# Altium PCB Secondary Display.PcbDoc
Units mm, origin at the board's own origin, x right, y up, seen from the top; angles counter-clockwise.
Board outline 43 x 41.4 mm, 2 copper layers (Top Layer, Bottom Layer); 3 components, 24 nets, 42 pads, 16 vias.
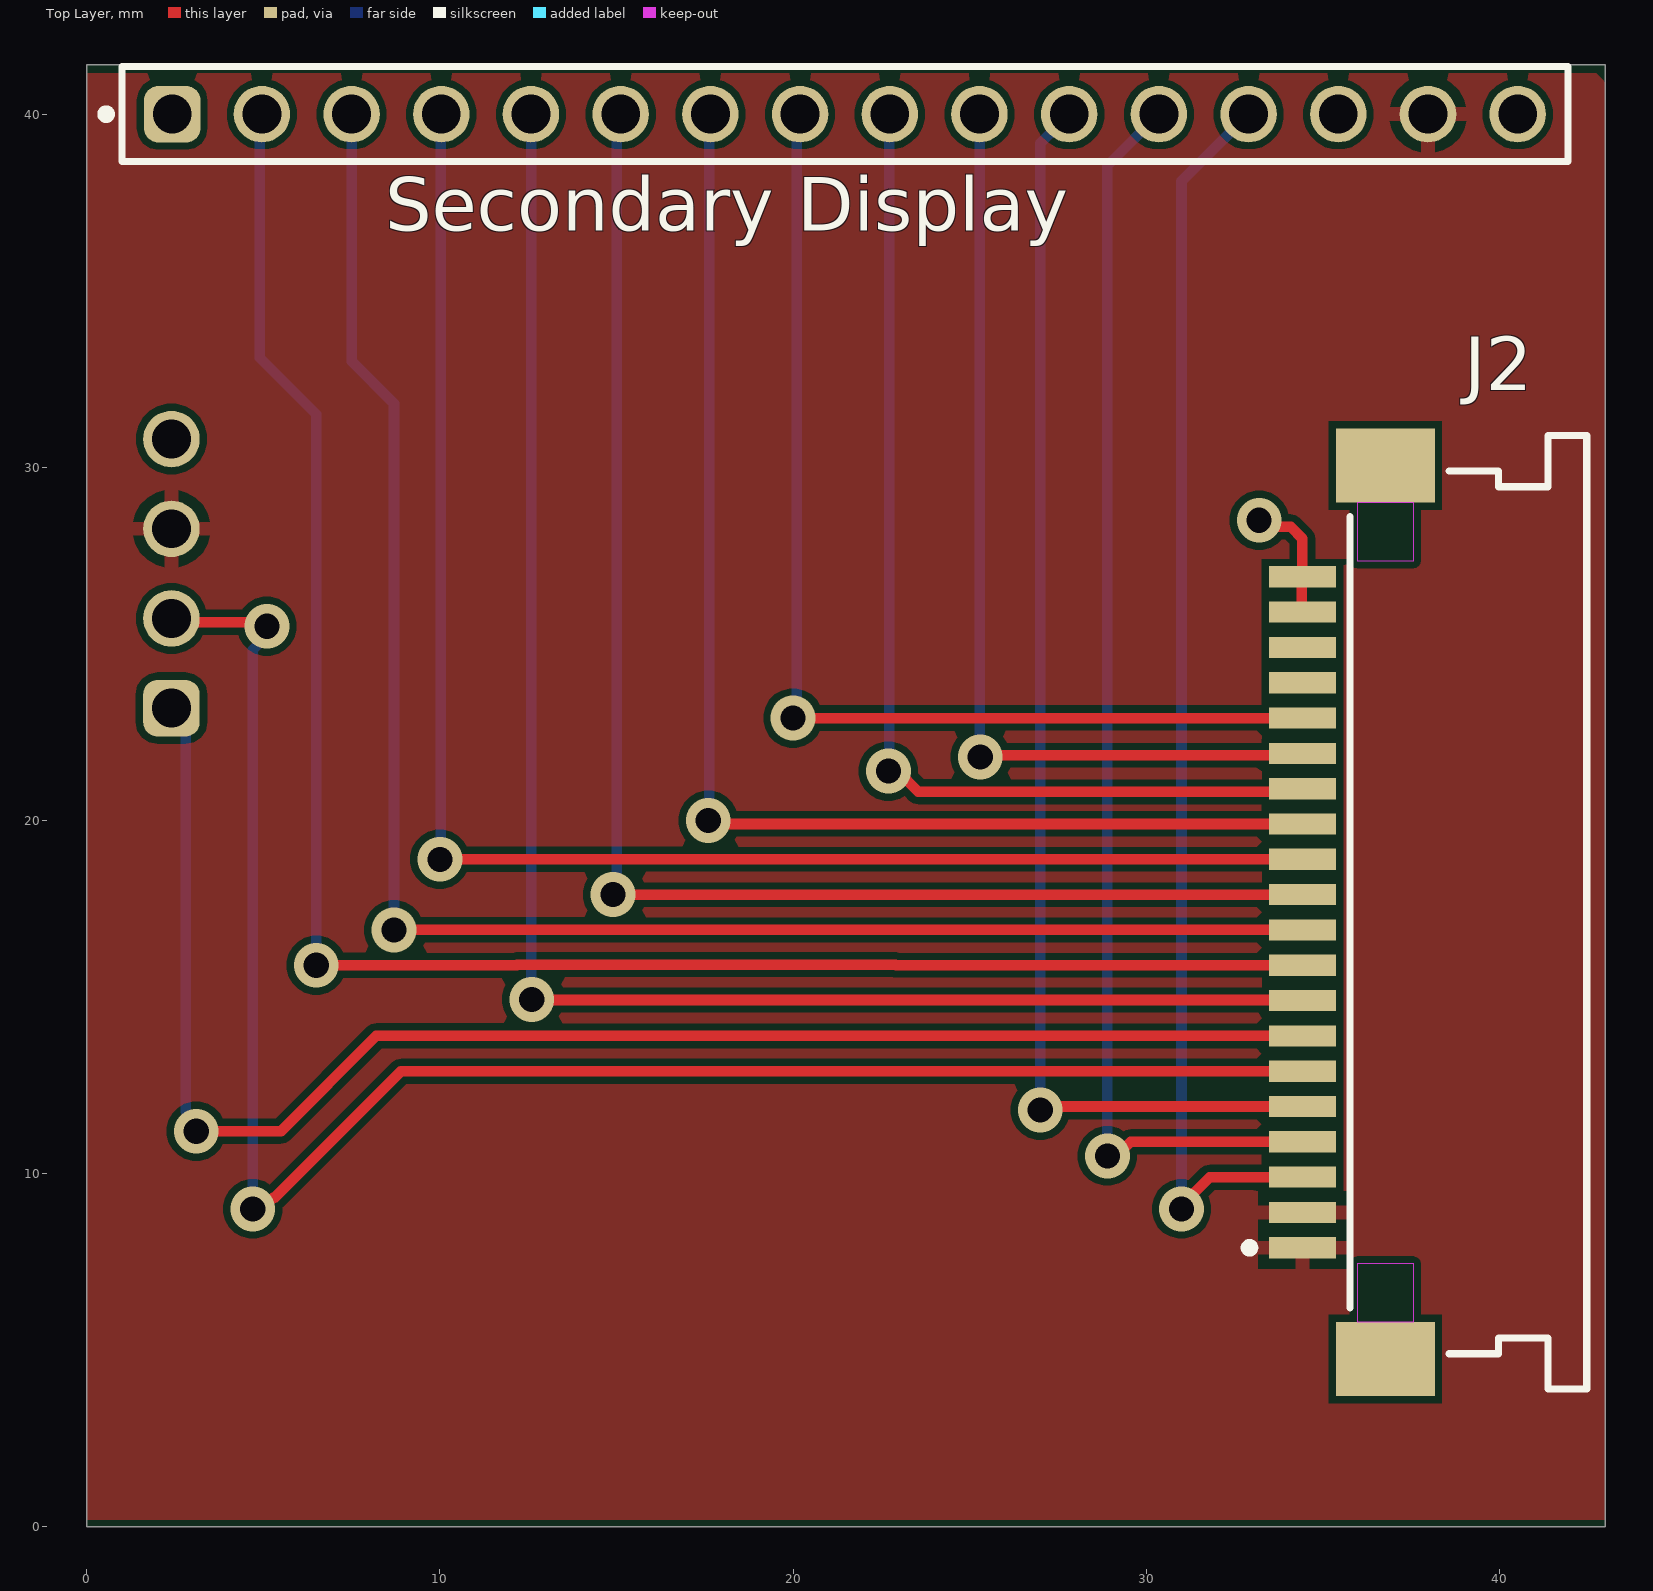
[diagram p0: Top Layer view]
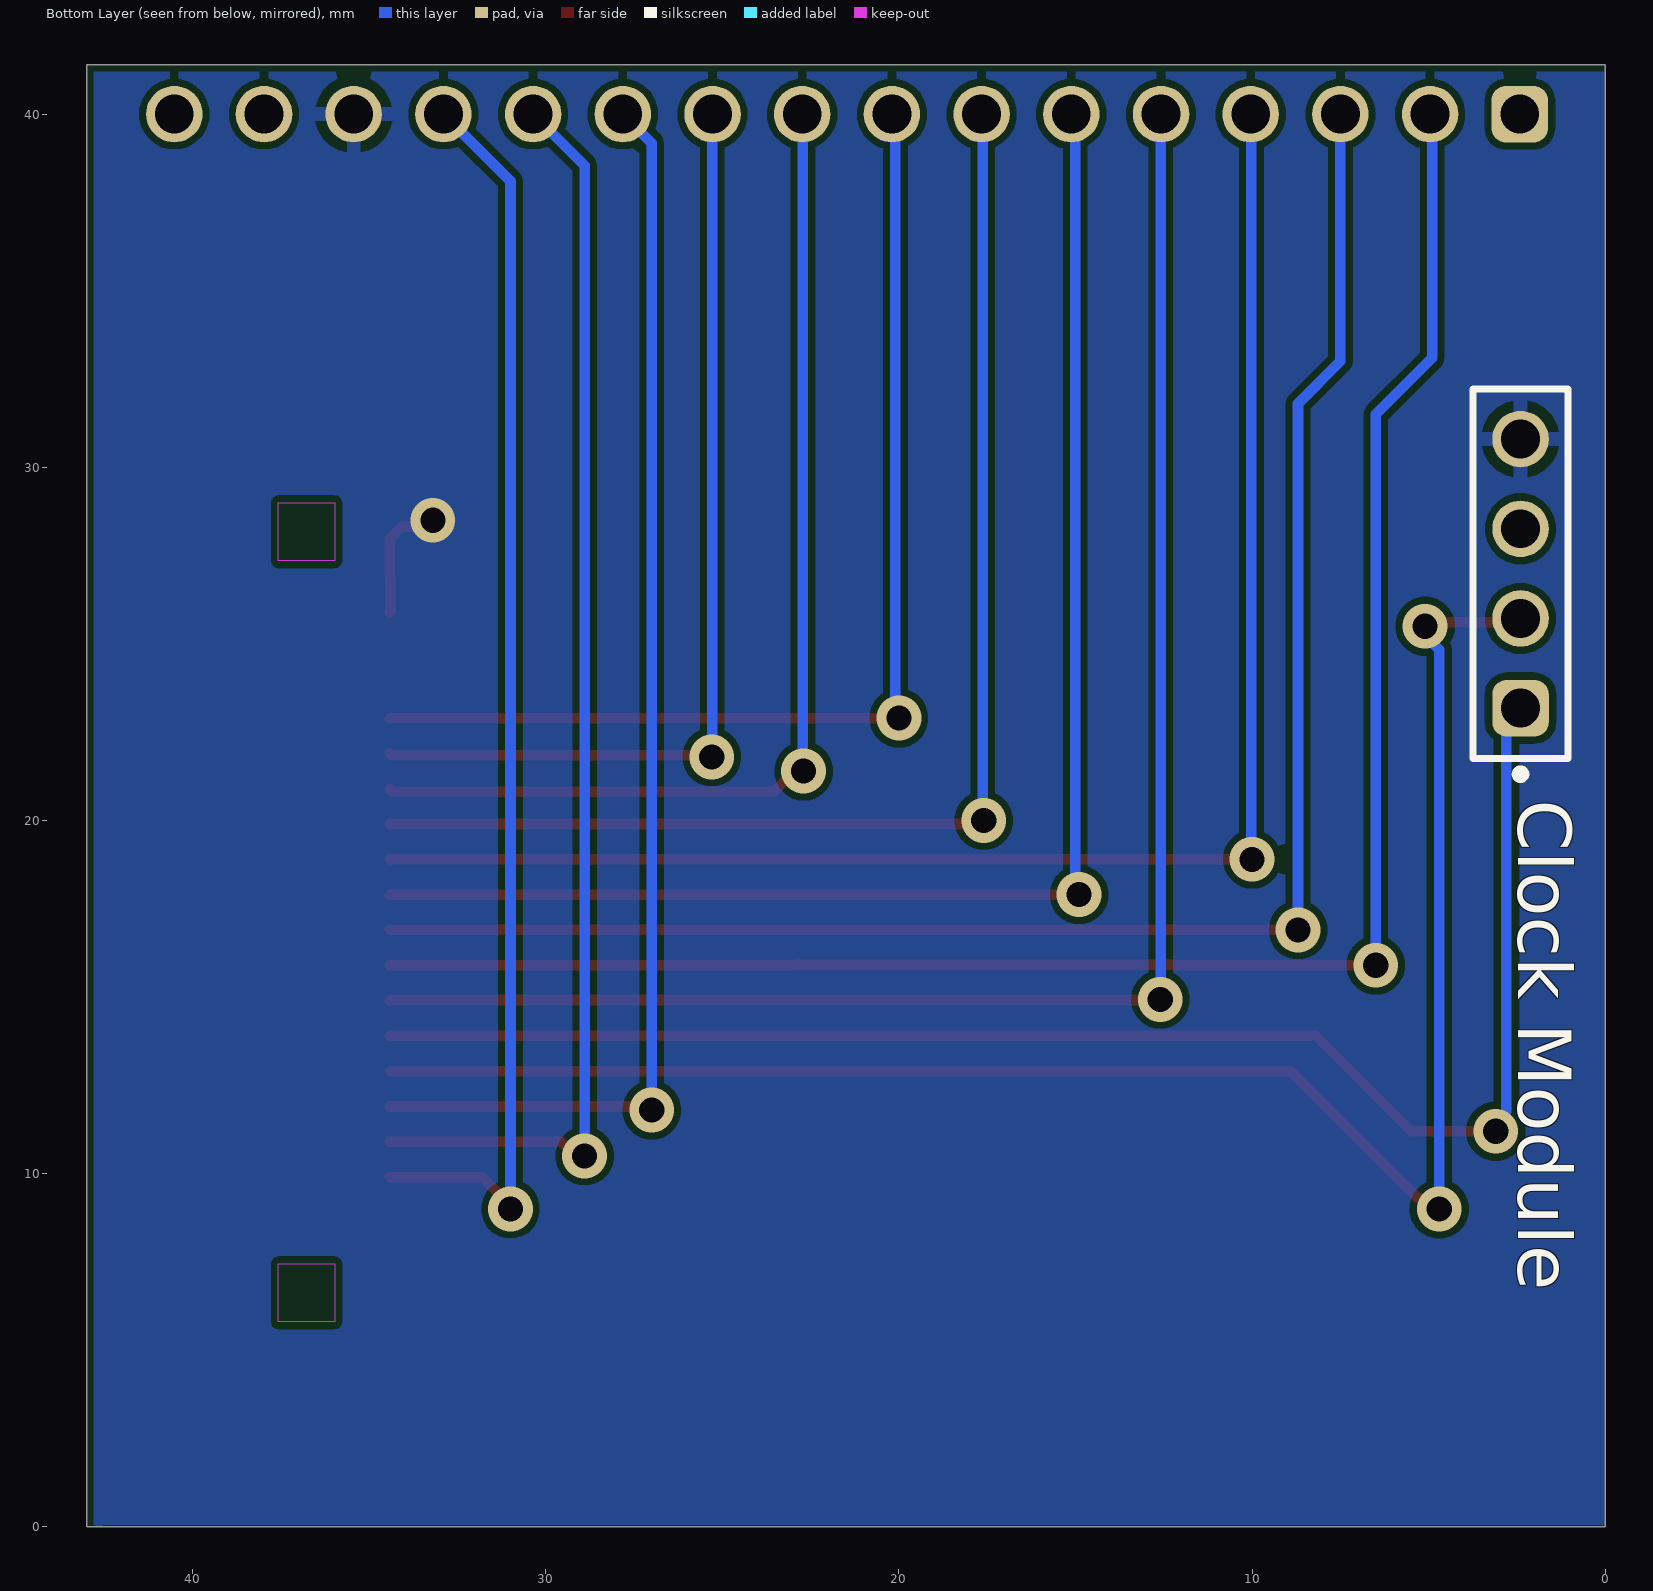
[diagram p1: Bottom Layer view, seen from below]

## Layer stack, top to bottom
Top Solder: solder mask 0.0102, Solder Resist, Dk 3.5
Top Layer: signal copper 0.0356
Dielectric1: dielectric 0.32, FR-4, Dk 4.8
Bottom Layer: signal copper 0.0356
Bottom Solder: solder mask 0.0102, Solder Resist, Dk 3.5

## Board outline
0,0 43,0 43,41.4 0,41.4

## Design rules (kind name [scope] priority, off if disabled: settings)
Clearance Polygon_Clearance [All vs InPolygon] p1: gap=0.2 ignorepadtopadclearanceinfootprint=FALSE
Clearance [All] p2: gap=0.2 ignorepadtopadclearanceinfootprint=TRUE
ComponentClearance [InComponent('U3')] p1: gap=0 collisioncheckmode=3 verticalgap=0.254 showdistances=FALSE
Height [All] p1: minheight=0 maxheight=75 prefheight=12.7
HoleSize [All] p1: absolutevalues=TRUE maxlimit=6.35 minlimit=0.3 maxpercent=80.000 minpercent=20.000
MinimumAnnularRing [All] p1: minimumring=0.15
MinimumSolderMaskSliver [All] p1: minsoldermaskwidth=0.2
NetAntennae NetAntennae_5.0V [InNet('5.0V')] p1: netantennaetolerance=0
NetAntennae NetAntennae_3.3V [InNet('3.3V')] p2: netantennaetolerance=0
PlaneClearance [All] p1: clearance=0.3
PlaneConnect [All] p1: planeconnectstyle=Relief reliefexpansion=0.3 reliefentries=4 reliefconductorwidth=0.3 reliefairgap=0.3
PolygonConnect ViaConnect [All vs IsVia] p1: connectstyle=Direct reliefconductorwidth=0.381 reliefentries=4 polygonreliefangle="90 Angle" airgapwidth=0.254
PolygonConnect [All] p2: connectstyle=Relief reliefconductorwidth=0.4 reliefentries=4 polygonreliefangle="90 Angle" airgapwidth=0.3
RoutingVias [All] p1: holewidth=0.3 width=0.6 viastyle="Through Hole" minholewidth=0.3 minwidth=0.6 maxholewidth=5 maxwidth=10
SilkToSilkClearance [All] p1: silktosilkclearance=0
SilkToSolderMaskClearance [IsPad] p1: minsilkscreentomaskgap=0 clearancetoexposedcopper=TRUE
SolderMaskExpansion [All] p1: expansion=0.102 istentingtop=FALSE
SupplyNets "Schematic Supply Nets" [InNet('GND')] p1: voltage=0.000
UnConnectedPin [All] p1 off:
Width [All] p1: maxlimit=10 minlimit=0.2 preferedwidth=0.3 minimp=50.000000 maximp=50.000000 favimp=50.000000
21 further rules are at their usual default settings.

## Components (designator, comment, footprint, x,y, rotation, side; value= is the part's Value field where it differs from the comment)
"Clock Module" "61300411121" 61300411121 2.4,26.99 r90 bottom
J2 "52271-2079" MOLX-52271-2079 35.6,17.4 r90 top
"Secondary Display" "61301611121" 61301611121 21.47,40 r0 top

## Footprints (in the part's own frame and the unit in brackets; to place one, negate y for a bottom-side part, rotate by r counter-clockwise, add the part's x,y. Pads: shape width x height; smd on the part's side, far side on the other; paste and mask are expansions set on the pad)
61300411121 [mm] "Pin Header, pitch 2.54 mm, THT, Vertical, single row, 4p"
  rrect50% 1.6x1.6 hole 1.1: 1(-3.81,0)
  round 1.6 hole 1.1: 2(-1.27,0) 3(1.27,0) 4(3.81,0)
  silkscreen extent -5.8,-1.35 5.23,1.35, body extent -5.08,-1.27 5.08,1.27, height 8.57
61301611121 [mm] "Pin Header, pitch 2.54 mm, THT, Vertical, single row, 16p"
  rrect50% 1.6x1.6 hole 1.1: 1(-19.05,0)
  round 1.6 hole 1.1: 2(-16.51,0) 3(-13.97,0) 4(-11.43,0) 5(-8.89,0) 6(-6.35,0) 7(-3.81,0) 8(-1.27,0) 9(1.27,0) 10(3.81,0) 11(6.35,0) 12(8.89,0) 13(11.43,0) 14(13.97,0) 15(16.51,0) 16(19.05,0)
  silkscreen extent -21.04,-1.35 20.47,1.35, body extent -20.32,-1.27 20.32,1.27, height 8.57
MOLX-52271-2079 [mm] "FPC Connector, 20-Leads, Right Angle, Pitch 1.0 mm, Mated Height 3.0 mm, SMT"
  rect 0.6x1.9 smd: 1(-9.5,1.175) 2(-8.5,1.175) 3(-7.5,1.175) 4(-6.5,1.175) 5(-5.5,1.175) 6(-4.5,1.175) 7(-3.5,1.175) 8(-2.5,1.175) 9(-1.5,1.175) 10(-0.5,1.175) 11(0.5,1.175) 12(1.5,1.175) 13(2.5,1.175) 14(3.5,1.175) 15(4.5,1.175) 16(5.5,1.175) 17(6.5,1.175) 18(7.5,1.175) 19(8.5,1.175) 20(9.5,1.175)
  rect 2.1x2.8 smd: MP1(-12.65,-1.175) MP2(12.65,-1.175)
  Keep-Out Layer region: -9.95,-0.375 -11.6,-0.375 -11.6,-1.975 -9.95,-1.975
  Keep-Out Layer region: 9.95,-1.975 11.6,-1.975 11.6,-0.375 9.95,-0.375
  silkscreen extent -13.5,-6.87 13.5,2.8, body extent -13.5,-6.87 13.5,1.82, height 3.01

## Part data
"Clock Module": library part CMP-1502-01064-3, Color=Black, Contact Resistance=20mΩ, Current Rating=3A, Max Operating Temperature=105°C, Min Operating Temperature=-40°C, Operating Supply Voltage=250V, Connector Type="Male Pin", Contact Material=Copper, Contact Mating Length=5.9944mm, Contact Plating=Gold, Gender=Male, Height=8.89mm, Lead Free="Lead Free", Lead Pitch=2.54mm, Mount="Through Hole", NexarPartId=32855522, Number of Contacts=4, Number of Pins=4, Number of Positions=4, Number of Rows=1, Orientation=Vertical, Packaging=Bulk, Pitch=2.54mm, REACH SVHC=Unknown, RoHS=Compliant, Termination=Solder, Voltage Rating=250V
J2: library part CMP-1241-00254-1, "1.0 mm Pitch Easy-On(TM) Type FPC Connector, 3.0 mm Mated Height, Right Angle, ZIF, SMT, Bottom Contact, 20 Circuits, -40 to 85 degC, ELV and RoHS Compliant, Tape and Reel", Current (Max per Contact)=0.5A, Manufacturer=Molex, Voltage (Max)="50V AC (RMS)/DC", Circuits (Loaded)=20, ComponentLink1Description="Manufacturer URL", ComponentLink1URL=http://www.molex.com/molex/index.jsp, ComponentLink2Description=Datasheet, ComponentLink2URL=http://www.molex.com/webdocs/datasheets/pdf/en-us/0522712079_FFC_FPC_CONNECTORS.pdf, ComponentLink3Description="Package Specification", ComponentLink3URL=http://www.molex.com/pdm_docs/sd/522712079_sd.pdf, Contact Position=Bottom, Durability (mating cycles max)=30, Entry Angle="90degrees Angle", Mated Height=3.00mm, Material - Metal="Phosphor Bronze", Material - Plating Mating=Tin-Bismuth, Material - Plating Termination=Tin-Bismuth, Mounting Technology="Surface Mount", Number of Rows=1, Orientation="Right Angle", PackageDescription="20-Lead FPC Connector, Pitch 1.0 mm", PackageReference=52271-2079, PackageVersion="Rev. B, 04/2004", Packing="Tape and Reel", PartNumber=52271-2079, PCB Locator=No, PCB Retention=Yes, Pitch - Mating Interface=1.00mm, Pitch - Termination Interface=1.00mm, Polarized to PCB=Yes, RoHS=TRUE, Stackable=No
"Secondary Display": library part CMP-1502-01095-4, Color=Black, Contact Resistance=20mΩ, Current Rating=3A, Max Operating Temperature=105°C, Min Operating Temperature=-40°C, Operating Supply Voltage=250V, Connector Type="Male Pin", Contact Material=Copper, Contact Mating Length=5.9944mm, Contact Plating=Gold, Gender=Male, Height=8.89mm, Lead Pitch=2.54mm, Mount="Through Hole", NexarPartId=32855548, Number of Contacts=16, Number of Pins=16, Number of Positions=16, Number of Rows=1, Orientation=Vertical, Packaging=Bulk, Pitch=2.54mm, REACH SVHC=Unknown, RoHS=Compliant, Termination=Solder, Voltage Rating=250V

## Via types
v1: diameter 1.27, hole 0.711, Top Layer to Bottom Layer, 16 vias

## Nets (pads, with @x,y where several pads share a name; then routed paths per layer and width w, separated by ;. In a path a pad name is that pad's centre, name@x,y a point inside that pad or via, vN(x,y) a via of type N, cw(c..) or ccw(c..) an arc to the next point about the centre after c; other vN are vias at no path point)
3.7V_IN: 
3_3V: "Clock Module.3" "Secondary Display.15" J2.1 J2.2
GND: "Clock Module.4" "Secondary Display.14" J2.19 J2.20 | length 3.5
  Top Layer w0.3: v1(33.2,28.5) 33.386,28.314 34.089,28.314 34.425,27.978 J2.20 ; J2.20@34.4,26.9 34.4,25.925 J2.19
I2C_SCL: "Clock Module.1" J2.7 | length 44.8
  Top Layer w0.3: 2.4,23.18 2.44,23.14 ; v1(3.1,11.2) 5.5,11.2 8.2,13.9 J2.7
  Bottom Layer w0.3: 2.4,23.18 2.8,22.78 2.8,11.762 3.1,11.462 v1(3.1,11.2)
I2C_SDA: "Clock Module.2" J2.6 | length 50.8
  Top Layer w0.3: 2.4,25.72 2.51,25.61 4.99,25.61 v1(5.1,25.5) ; v1(4.7,9) 4.962,9 5.28,9.317 5.317,9.317 8.9,12.9 J2.6@34.4,12.9
  Bottom Layer w0.3: v1(4.7,9) 4.7,24.838 5.1,25.238 v1(5.1,25.5)
SEC_SCREEN_BACKLIGHT: "Secondary Display.8" J2.16 | length 31.4
  Top Layer w0.3: v1(20,22.9) J2.16
  Bottom Layer w0.3: v1(20,22.9) 20.1,23 20.1,39.6 20.3,39.8
SEC_SCREEN_TOGGLE: 
SPI0_CSn_LEFT: "Secondary Display.13" J2.3 | length 35.6
  Top Layer w0.3: v1@31,9.1 31.8,9.9 J2.3
  Bottom Layer w0.3: v1(31,9) 31,38.1 32.8,39.9 33,39.9
SPI0_CSn_RIGHT: 
SPI0_DC_LEFT: "Secondary Display.11" J2.5 | length 36
  Top Layer w0.3: v1(27,11.8) 27.1,11.9 J2.5
  Bottom Layer w0.3: v1(27,11.8) 27,39.18 27.82,40
SPI0_DC_RIGHT: 
SPI0_RESET_LEFT: "Secondary Display.12" J2.4 | length 35.6
  Top Layer w0.3: v1(28.9,10.5) 29.162,10.5 29.563,10.9 J2.4
  Bottom Layer w0.3: v1(28.9,10.5) 28.9,38.54 30.2,39.84 30.2,39.9
SPI0_RESET_RIGHT: 
SPI0_RX: "Secondary Display.7" J2.13 | length 36.8
  Top Layer w0.3: v1(17.6,20) 17.7,19.9 J2.13
  Bottom Layer w0.3: v1(17.6,20) 17.63,20.03 17.63,39.83 17.7,39.9
SPI0_SCK: "Secondary Display.9" J2.14 | length 30.3
  Top Layer w0.3: v1(22.7,21.4) 22.962,21.4 23.547,20.815 34.34,20.815 J2.14
  Bottom Layer w0.3: v1(22.7,21.4) 22.72,21.42 22.72,39.62 22.8,39.7
SPI0_TX: "Secondary Display.10" J2.15 | length 27.4
  Top Layer w0.3: v1(25.3,21.8) 25.35,21.85 34.375,21.85 J2.15
  Bottom Layer w0.3: 25.1,40 25.29,39.81 25.29,21.81 v1(25.3,21.8)
T2_CS: "Secondary Display.5" J2.8 | length 46.6
  Top Layer w0.3: v1(12.6,14.935) 12.617,14.918 34.408,14.918 J2.8
  Bottom Layer w0.3: v1(12.6,14.935) 12.59,14.945 12.59,39.69 12.6,39.7
T_CLK: "Secondary Display.6" J2.11 | length 41.6
  Top Layer w0.3: v1(14.9,17.9) J2.11
  Bottom Layer w0.3: v1(14.9,17.9) 15.01,18.01 15.01,39.79 14.9,39.9
T_CS: 
T_DIN: "Secondary Display.4" J2.12 | length 45.4
  Top Layer w0.3: v1(10,18.9) J2.12
  Bottom Layer w0.3: v1(10,18.9) 10.02,18.92 10.02,39.88 10,39.9
T_DO: "Secondary Display.3" J2.10 | length 49.1
  Top Layer w0.3: v1(8.7,16.9) J2.10
  Bottom Layer w0.3: 7.5,39.8 7.5,33 8.7,31.8 v1(8.7,16.9)
T_IRQ: "Secondary Display.2" J2.9 | length 52.4
  Top Layer w0.3: v1@6.6,15.9 12.172,15.9 12.192,15.92 22.899,15.92 22.918,15.9 J2.9
  Bottom Layer w0.3: 4.9,39.8 4.9,33.1 6.5,31.5 v1(6.5,15.9)
V_IN: 
VCC: 
pads on no net: "Secondary Display.1" "Secondary Display.16" J2.17 J2.18 J2.MP1 J2.MP2

## Polygon pours and split planes (outlines as drawn)
GND on Bottom Layer "GND" (solid, pour order 0): 0,41.234 0.034,41.2 42.8,41.2 42.8,-0.2 42.546,0.054 0,0.054
3_3V on Top Layer "3_3V" (solid, pour order 1): 0,41.159 42.741,41.159 43,40.9 43,0.2 0.005,0.2 0,0.205